# Altium PCB MS-002.28T003.PcbDoc
Units mil, origin at the board's own origin, x right, y up, seen from the top; angles counter-clockwise.
Board outline 984.25 x 11023.62 mil, 2 copper layers (Top Layer, Bottom Layer); 65 components, 33 nets, 132 pads, 22 vias.
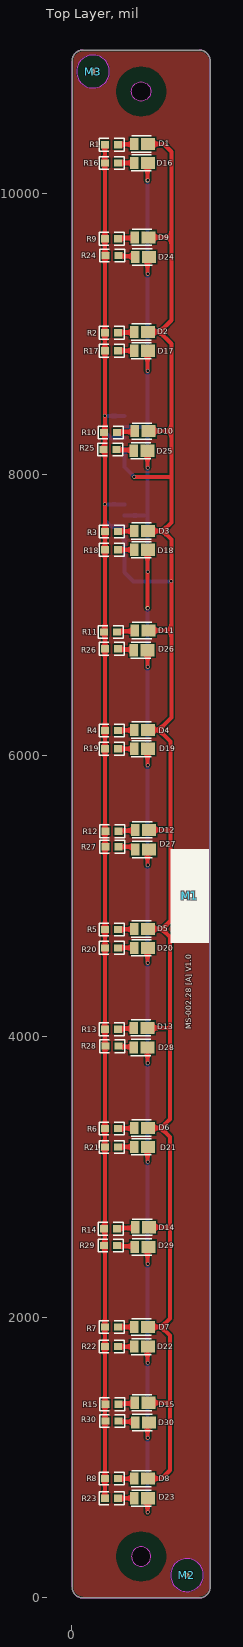
[diagram p0: Top Layer view]
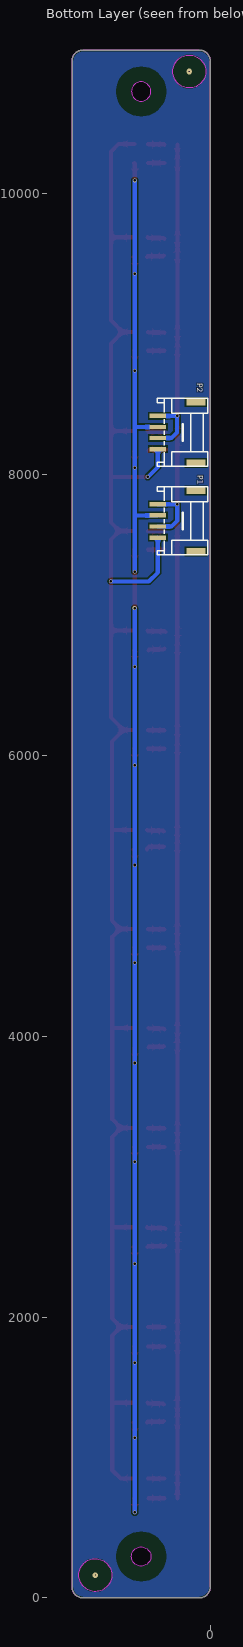
[diagram p1: Bottom Layer view, seen from below]
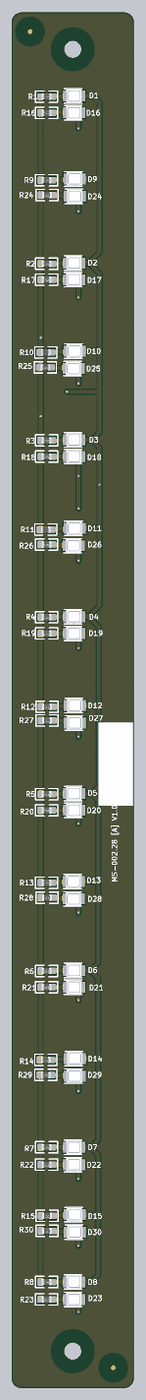
[diagram p2: 3D render of the assembled board from above, using the file's embedded part models]

## Layer stack, top to bottom
Top Solder: solder mask 0.4, Solder Resist, Dk 3.5
Top Layer: signal copper 1.4
Dielectric 1: dielectric 12.6, FR-4, Dk 4.8
Bottom Layer: signal copper 1.4
Bottom Solder: solder mask 0.4, Solder Resist, Dk 3.5

## Board outline
2.38,79.13 2.38,10945.27 cw(c81.12,10945.27) 81.12,11024.01 907.89,11024.01 cw(c907.89,10945.27) 986.63,10945.27 986.63,79.13 cw(c907.89,79.13) 907.89,0.39 81.12,0.39 cw(c81.12,79.13)
cut-out: 425.61,295.67 ccw(c494.51,295.67) 494.51,226.77 ccw(c494.51,295.67) 563.41,295.67 ccw(c494.51,295.67) 494.51,364.57 ccw(c494.51,295.67)
cut-out: 494.51,10659.84 cw(c494.51,10728.74) 425.61,10728.74 cw(c494.51,10728.74) 494.51,10797.64 cw(c494.51,10728.74) 563.41,10728.74 cw(c494.51,10728.74)

## Design rules (kind name [scope] priority, off if disabled: settings)
Clearance [All] p1: gap=10 ignorepadtopadclearanceinfootprint=FALSE except(0: Arc-Hole Track-Hole SMDPad-Hole THPad-Hole Via-Hole Fill-Hole Poly-Hole Region-Hole Text-Hole)
HoleSize [All] p1: absolutevalues=TRUE maxlimit=100 minlimit=0 maxpercent=80.000 minpercent=20.000
PolygonConnect [All] p1: connectstyle=Relief reliefconductorwidth=10 reliefentries=4 polygonreliefangle="90 Angle" airgapwidth=10
RoomDefinition MS-002.28T002 [InComponentClass('MS-002.28T002')] p1: confinementstyle=ConfineOut formatcopy=TRUE lockcomponents=FALSE outline 1229,391 2310,391 2310,730 1229,730
RoutingVias [All] p1: holewidth=18 width=25 viastyle="Through Hole" minholewidth=18 minwidth=25 maxholewidth=18 maxwidth=25
SilkToSolderMaskClearance [IsPad] p1: minsilkscreentomaskgap=0 clearancetoexposedcopper=TRUE
SolderMaskExpansion [All] p1: expansion=4 istentingtop=FALSE
Width [All] p1: maxlimit=30 minlimit=30 preferedwidth=30
28 further rules are at their usual default settings.

## Components (designator, comment, footprint, x,y, rotation, side; value= is the part's Value field where it differs from the comment)
D1 "HL-A-3528S31YC-S1-13HL" LED_2835#1 494.93,10354.72 r0 top
D2 "HL-A-3528S31YC-S1-13HL" LED_2835#1 494.93,9016.14 r0 top
D3 "HL-A-3528S31YC-S1-13HL" LED_2835#1 494.93,7598.82 r0 top
D4 "HL-A-3528S31YC-S1-13HL" LED_2835#1 494.93,6181.5 r0 top
D5 "HL-A-3528S31YC-S1-13HL" LED_2835#1 494.93,4764.17 r0 top
D6 "HL-A-3528S31YC-S1-13HL" LED_2835#1 494.93,3346.85 r0 top
D7 "HL-A-3528S31YC-S1-13HL" LED_2835#1 494.93,1929.53 r0 top
D8 "HL-A-3528S31YC-S1-13HL" LED_2835#1 494.93,850 r0 top
D9 "HL-A-3528S31YC-S1-13HL" LED_2835#2 450,9690 r0 top
D10 "HL-A-3528S31YC-S1-13HL" LED_2835#2 450,8310 r0 top
D11 "HL-A-3528S31YC-S1-13HL" LED_2835#2 450,6890 r0 top
D12 "HL-A-3528S31YC-S1-13HL" LED_2835#2 452.76,5470 r0 top
D13 "HL-A-3528S31YC-S1-13HL" LED_2835#2 442.76,4060 r0 top
D14 "HL-A-3528S31YC-S1-13HL" LED_2835#2 452.76,2640 r0 top
D15 "HL-A-3528S31YC-S1-13HL" LED_2835#2 450,1390 r0 top
D16 "HL-A-3528H203BC-S1-13HL" LED_2835#1 494.93,10220 r0 top
D17 "HL-A-3528H203BC-S1-13HL" LED_2835#1 494.93,8882.52 r0 top
D18 "HL-A-3528H203BC-S1-13HL" LED_2835#1 494.93,7465.04 r0 top
D19 "HL-A-3528H203BC-S1-13HL" LED_2835#1 494.93,6047.56 r0 top
D20 "HL-A-3528H203BC-S1-13HL" LED_2835#1 494.93,4630.08 r0 top
D21 "HL-A-3528H203BC-S1-13HL" LED_2835#1 494.93,3212.6 r0 top
D22 "HL-A-3528H203BC-S1-13HL" LED_2835#1 494.93,1790 r0 top
D23 "HL-A-3528H203BC-S1-13HL" LED_2835#1 494.93,710 r0 top
D24 "HL-A-3528H203BC-S1-13HL" LED_2835#2 452.76,9550 r0 top
D25 "HL-A-3528H203BC-S1-13HL" LED_2835#2 442.76,8170 r0 top
D26 "HL-A-3528H203BC-S1-13HL" LED_2835#2 442.76,6750 r0 top
D27 "HL-A-3528H203BC-S1-13HL" LED_2835#2 452.76,5330 r0 top
D28 "HL-A-3528H203BC-S1-13HL" LED_2835#2 442.76,3920 r0 top
D29 "HL-A-3528H203BC-S1-13HL" LED_2835#2 450,2500 r0 top
D30 "HL-A-3528H203BC-S1-13HL" LED_2835#2 452.76,1250 r0 top
M1 "粘贴标签位置" Label 840,5000 r90 top
M2 "MARK" MARK 821,163 r0 top
M3 "MARK" MARK 152,10871 r0 top
P1 "PHB-4" "PHB-4Y - duplicate" 240,7670 r270 bottom
P2 "PHB-4" PHB-4 240,8300 r270 bottom
R1 "470Ω/0805" 0805_R 330,10350 r180 top
R2 "470Ω/0805" 0805_R 330,9010 r180 top
R3 "470Ω/0805" 0805_R 330.42,7595.04 r180 top
R4 "470Ω/0805" 0805_R 330.42,6177.56 r180 top
R5 "470Ω/0805" 0805_R 330.42,4760.08 r180 top
R6 "470Ω/0805" 0805_R 330,3342.6 r180 top
R7 "470Ω/0805" 0805_R 330,1930 r180 top
R8 "470Ω/0805" 0805_R 330,850 r180 top
R9 "470Ω/0805" 0805_R 330,9680 r180 top
R10 "470Ω/0805" 0805_R 323.66,8300 r180 top
R11 "470Ω/0805" 0805_R 323.66,6880 r180 top
R12 "470Ω/0805" 0805_R 333.66,5460 r180 top
R13 "470Ω/0805" 0805_R 330,4050 r180 top
R14 "470Ω/0805" 0805_R 323.66,2630 r180 top
R15 "470Ω/0805" 0805_R 333.66,1380 r180 top
R16 "470Ω/0805" 0805_R 330,10220 r180 top
R17 "470Ω/0805" 0805_R 330.42,8882.52 r180 top
R18 "470Ω/0805" 0805_R 330.42,7465.04 r180 top
R19 "470Ω/0805" 0805_R 330.42,6047.56 r180 top
R20 "470Ω/0805" 0805_R 330.42,4630.08 r180 top
R21 "470Ω/0805" 0805_R 330,3212.6 r180 top
R22 "470Ω/0805" 0805_R 330,1790 r180 top
R23 "470Ω/0805" 0805_R 330,710 r180 top
R24 "470Ω/0805" 0805_R 333.66,9560 r180 top
R25 "470Ω/0805" 0805_R 320,8180 r180 top
R26 "470Ω/0805" 0805_R 330,6760 r180 top
R27 "470Ω/0805" 0805_R 333.66,5350 r180 top
R28 "470Ω/0805" 0805_R 333.66,3930 r180 top
R29 "470Ω/0805" 0805_R 323.66,2510 r180 top
R30 "470Ω/0805" 0805_R 333.66,1260 r180 top

## Footprints (in the part's own frame and the unit in brackets; to place one, negate y for a bottom-side part, rotate by r counter-clockwise, add the part's x,y. Pads: shape width x height; smd on the part's side, far side on the other; paste and mask are expansions set on the pad)
0805_R [mm]
  rect 1.45x1.3 smd: 1(0,0) 2(2.379,0)
  silkscreen extent -1.09,-1.15 3.43,1.15, body extent 0.17,-0.62 2.17,0.63, height 0.53
Label [mil] "粘贴标签位置"
  silkscreen extent -335,-138 335,138
LED_2835#1 [mm]
  rect 1.501x2.2 smd mask+0.05: 1(-1.235,0)
  rect 2.53x2.2 smd mask+0.05: 2(1.235,0)
  silkscreen extent -1.79,-1.46 1.86,1.46, body extent -1.52,-1.4 1.97,1.4, height 0.8
LED_2835#2 [mm]
  rect 1.501x2.2 smd mask+0.05: 1(0,0)
  rect 2.53x2.2 smd mask+0.05: 2(2.47,0)
  silkscreen extent -0.55,-1.46 3.09,1.46, body extent -0.29,-1.4 3.21,1.4, height 0.8
MARK [mil]
  Top Layer keep-out circle w3.94: c0,0 r117.15
  Bottom Layer keep-out circle w3.94: c0,0 r117.15
PHB-4 [mm]
  rect 1.2x3.5 smd: 0(-5.505,3.45) 0(5.505,3.45)
  rect 0.8x3 smd: 1(-3.005,-3.45) 2(-1.005,-3.45) 3(0.995,-3.45) 4(2.995,-3.45)
  silkscreen extent -6.18,-3.58 6.14,5.55, body extent -5.96,-4.04 5.94,4.26, height 5.55
"PHB-4Y - duplicate" [mm]
  rect 1.2x3.5 smd: 0(-5.505,3.45) 0(5.505,3.45)
  rect 0.8x3 smd: 1(-3.005,-3.45) 2(-1.005,-3.45) 3(0.995,-3.45) 4(2.995,-3.45)
  silkscreen extent -6.18,-3.58 6.14,5.55, body extent -5.96,-4.04 5.94,4.26, height 5.55

## Part data
D1 D2 D3 D4 D5 D6 D7 D8 D9 D10 D11 D12 D13 D14 D15 D16 D17 D18 D19 D20 D21 D22 D23 D24 D25 D26 D27 D28 D29 D30: library part LED3, "Typical BLUE SiC LED", DatasheetVersion=16-Apr-2002, LatestRevisionDate=17-Dec-2003, LatestRevisionNote="PCB Footprint replaced.", PackageDescription="SM LED; 2 C-Bend Leads; Body 3.5 x 2.8 x 1.9 mm, inc leads (LxWxH typ)", PackageReference=3.5X2.8X1.9, PackageVersion=16-Apr-2002, Published=8-Jun-2000, Publisher="Altium Limited"
M1: library part LABEL
M2 M3: "贴片所需MARK点"
P1 P2: library part HEADER4
R1 R2 R3 R4 R5 R6 R7 R8 R9 R10 R11 R12 R13 R14 R15 R16 R17 R18 R19 R20 R21 R22 R23 R24 R25 R26 R27 R28 R29 R30: library part "0805 13KΩ (1302) 1%", "贴片电阻", PACKAGE=0805, SuppliersPartNumber=C17455, ComponentLink1Description=供应商链接, ComponentLink1URL=http://www.szlcsc.com/product/details_18143.html, Supplier=LC

## Via types
v1: diameter 25, hole 18, Top Layer to Bottom Layer, tented both sides, 18 vias
v2: diameter 39.37, hole 0, Top Layer to Bottom Layer, 2 vias
v3: diameter 28, hole 18, Top Layer to Bottom Layer, tented both sides, 2 vias

## Nets (pads, with @x,y where several pads share a name; then routed paths per layer and width w, separated by ;. In a path a pad name is that pad's centre, name@x,y a point inside that pad or via, vN(x,y) a via of type N, cw(c..) or ccw(c..) an arc to the next point about the centre after c; other vN are vias at no path point)
NetD1_1: D1.1 R1.1 | length 118.3
  Top Layer w30: R1.1 332.36,10352.36 443.95,10352.36 D1.1
NetD1_2: D1.2 D2.2 D3.2 D4.2 D5.2 D6.2 D7.2 D8.2 D9.2 D10.2 D11.2 D12.2 D13.2 D14.2 D15.2 P1.4 P2.4 | length 12865.6
  Top Layer w30: v1(447,7984) 709,7984 710,7985 ; D13.2 699.17,4060 700,4059.17 ; D8.2 640,850 700,910 700,1389.53 ; D7.2 639.53,1929.53 ; D6.2 636.85,3346.85 ; D5.2 644.17,4764.17 ; D4.2 621.5,6181.5 ; D3.2 648.82,7598.82 ; D2.2 626.14,9016.14 ; D1.2 655.28,10354.72 710,10300 710,9690 ; D15.2 699.53,1390 700,1389.53 ; D11.2 710,6890 ; D10.2 710,8310 ; D9.2 710,9690 ; D14.2 696.85,2640 700,2636.85 ; D12.2 694.49,5470 702.99,5461.5 ; 621.5,6181.5 702.99,6100 702.99,5461.5 ; 621.5,6181.5 710,6270 710,6890 ; 626.14,9016.14 710,8932.28 710,8310 ; 626.14,9016.14 710,9100 710,9690 ; 636.85,3346.85 700,3283.7 700,2636.85 ; 636.85,3346.85 700,3410 700,4059.17 ; 639.53,1929.53 700,1869.05 700,1389.53 ; 639.53,1929.53 700,1990 700,2636.85 ; 644.17,4764.17 702.99,4822.99 702.99,5461.5 ; 644.17,4764.17 700,4708.34 700,4059.17 ; 648.82,7598.82 710,7537.64 v1(710,7240) 710,6890 ; 648.82,7598.82 710,7660 710,7985 ; 710,7985 710,8310
  Bottom Layer w30: P1.4 375.83,7304.17 440,7240 v1(710,7240) ; P2.4 375.83,8055.17 v1(447,7984)
NetD2_1: D2.1 R2.1 | length 118.9
  Top Layer w30: R2.1 333.07,9013.07 443.24,9013.07 D2.1
NetD3_1: D3.1 R3.1 | length 117.5
  Top Layer w30: R3.1 332.31,7596.93 444.42,7596.93 D3.1
NetD4_1: D4.1 R4.1 | length 117.5
  Top Layer w30: R4.1 332.39,6179.53 444.34,6179.53 D4.1
NetD5_1: D5.1 R5.1 | length 117.6
  Top Layer w30: R5.1 332.47,4762.13 444.26,4762.13 D5.1
NetD6_1: D6.1 R6.1 | length 118.1
  Top Layer w30: R6.1 332.13,3344.72 444.18,3344.72 D6.1
NetD7_1: D7.1 R7.1 | length 116.5
  Top Layer w30: R7.1 330.24,1929.76 446.07,1929.76 D7.1
NetD8_1: D8.1 R8.1 | length 116.3
  Top Layer w30: R8.1 D8.1
NetD9_1: D9.1 R9.1 | length 124.1
  Top Layer w30: R9.1 335,9685 445,9685 D9.1
NetD10_1: D10.1 R10.1 | length 130.5
  Top Layer w30: R10.1 328.66,8305 445,8305 D10.1
NetD11_1: D11.1 R11.1 | length 130.5
  Top Layer w30: R11.1 328.66,6885 445,6885 D11.1
NetD12_1: D12.1 R12.1 | length 123.2
  Top Layer w30: R12.1 338.66,5465 447.76,5465 D12.1
NetD13_1: D13.1 R13.1 | length 116.9
  Top Layer w30: R13.1 335,4055 437.76,4055 D13.1
NetD14_1: D14.1 R14.1 | length 133.2
  Top Layer w30: R14.1 328.66,2635 447.76,2635 D14.1
NetD15_1: D15.1 R15.1 | length 120.5
  Top Layer w30: R15.1 338.66,1385 445,1385 D15.1
NetD16_1: D16.1 R16.1 | length 116.3
  Top Layer w30: R16.1 D16.1
NetD16_2: D16.2 D17.2 D18.2 D19.2 D20.2 D21.2 D22.2 D23.2 D24.2 D25.2 D26.2 D27.2 D28.2 D29.2 D30.2 P1.2 P2.2 | length 11672
  Top Layer w30: v1(540,610) 540,706.45 D23.2 ; v1(540,1140) 540,1240 D30.2 ; v1(540,1676.45) 540,1786.45 D22.2 ; v1(540,2380) 540,2492.76 D29.2 ; v1(540,3108.22) 540,3209.05 D21.2 ; v1(540,3810) D28.2 ; v1(540,4523.55) 540,4626.53 D20.2 ; v1(540,5220) 540,5320 D27.2 ; v1(540,5930) 540,6044.01 D19.2 ; D26.2 543.55,6746.45 535.39,6738.28 540.78,6732.9 v1(540.78,6630.78) ; v1(540,8050) 540,8162.9 543.55,8166.45 D25.2 ; v1(540,8740) 540,8878.97 D17.2 ; v1(540,9430) 540,9540 D24.2 ; v3(540,10095) 540,10216.45 D16.2 ; v3(540.78,7049.22) 540,7050 540,7461.49 D18.2
  Bottom Layer w30: P1.2 530.21,7709.57 539.99,7699.79 v1(540,7310) ; P2.2 537.57,8339.57 540,8342 ; v1(540,610) v1(540,1140) v1(540,1676.45) v1(540,2380) v1(540,3108.22) v1(540,3810) v1(540,4523.55) v1(540,5220) v1(540,5930) 540,5907.1 540.78,5906.33 v1(540.78,6630.78) v3(540.78,7049.22) ; v3(540,10095) v1(540,9430) v1(540,8740) 540,8342 ; 540.88,7705.57 540,7706.45 v1(540,8050) 540,8342
NetD17_1: D17.1 R17.1 | length 115.9
  Top Layer w30: R17.1 D17.1
NetD18_1: D18.1 R18.1 | length 115.9
  Top Layer w30: R18.1 D18.1
NetD19_1: D19.1 R19.1 | length 115.9
  Top Layer w30: R19.1 D19.1
NetD20_1: D20.1 R20.1 | length 115.9
  Top Layer w30: R20.1 D20.1
NetD21_1: D21.1 R21.1 | length 116.3
  Top Layer w30: R21.1 D21.1
NetD22_1: D22.1 R22.1 | length 116.3
  Top Layer w30: R22.1 D22.1
NetD23_1: D23.1 R23.1 | length 111.5
  Top Layer w30: R23.1 441.06,710 441.22,710.16 D23.1@441.38,710
NetD24_1: D24.1 R24.1 | length 123.2
  Top Layer w30: R24.1 338.66,9555 447.76,9555 D24.1
NetD25_1: D25.1 R25.1 | length 126.9
  Top Layer w30: R25.1 325,8175 437.76,8175 D25.1
NetD26_1: D26.1 R26.1 | length 116.9
  Top Layer w30: R26.1 335,6755 437.76,6755 D26.1
NetD27_1: D27.1 R27.1 | length 130.6
  Top Layer w30: R27.1 438.21,5350 452.76,5335.45 D27.1
NetD28_1: D28.1 R28.1 | length 113.2
  Top Layer w30: R28.1 338.66,3925 437.76,3925 D28.1
NetD29_1: D29.1 R29.1 | length 130.5
  Top Layer w30: R29.1 328.66,2505 445,2505 D29.1
NetD30_1: D30.1 R30.1 | length 123.2
  Top Layer w30: R30.1 338.66,1255 447.76,1255 D30.1
VCC: P1.1 P1.3 P2.1 P2.3 R1.2 R2.2 R3.2 R4.2 R5.2 R6.2 R7.2 R8.2 R9.2 R10.2 R11.2 R12.2 R13.2 R14.2 R15.2 R16.2 R17.2 R18.2 R19.2 R20.2 R21.2 R22.2 R23.2 R24.2 R25.2 R26.2 R27.2 R28.2 R29.2 R30.2 | length 10461.4
  Top Layer w30: R23.2 R8.2 R22.2 R7.2 R21.2 R6.2 236.55,3342.81 236.55,4629.87 R20.2 R5.2 R19.2 R4.2 R18.2 R3.2 v1(236.76,7788.31) R17.2 236.55,8882.73 236.55,9009.79 R2.2 R16.2 R1.2
  Bottom Layer w30: P1.3 279.17,7630.83 236.76,7673.24 v1(236.76,7788.31) P1.1 ; P2.3 279.17,8260.83 239,8301 239,8416 v1(237,8418) 237.31,8418.31 P2.1
pads on no net: P1.0 P2.0
copper on no net:
  other v2: 821,163 152,10871

## Polygon pours and split planes (outlines as drawn)
no net on Bottom Layer "NONET_L02_P001" (solid, pour order 1): 2.38,79.13 2.38,10945.27 cw(c81.12,10945.27) 81.12,11024.01 907.89,11024.01 cw(c907.89,10945.27) 986.63,10945.27 986.63,79.13 cw(c907.89,79.13) 907.89,0.39 81.12,0.39 cw(c81.12,79.13)
no net on Top Layer "NONET_L01_P000" (solid, pour order 0): 2.38,79.13 2.38,10945.27 cw(c81.12,10945.27) 81.12,11024.01 907.89,11024.01 cw(c907.89,10945.27) 986.63,10945.27 986.63,79.13 cw(c907.89,79.13) 907.89,0.39 81.12,0.39 cw(c81.12,79.13)

## Keep-outs
Keep-Out Layer:
  pour cut-out: 152,10871
  lines w0.5: 2.57,78.83 ccw(c81.31,78.83) 81.31,0.09 908.08,0.09 ccw(c908.08,78.83) 986.82,78.83 986.82,10944.97 ccw(c908.08,10944.97) 908.08,11023.71 81.31,11023.71 ccw(c81.31,10944.97) 2.57,10944.97 2.57,78.83

## Other copper
Top Layer:
  pour cut-out: 317.34,10728.74 ccw(c494.51,10728.74) 494.51,10551.57 ccw(c494.51,10728.74) 671.67,10728.74 ccw(c494.51,10728.74) 494.51,10905.9 ccw(c494.51,10728.74)
  pour cut-out: 317.34,10728.74 ccw(c494.51,10728.74) 494.51,10551.57 ccw(c494.51,10728.74) 671.67,10728.74 ccw(c494.51,10728.74) 494.51,10905.9 ccw(c494.51,10728.74)
  pour cut-out: 317.34,295.67 ccw(c494.51,295.67) 494.51,118.5 ccw(c494.51,295.67) 671.67,295.67 ccw(c494.51,295.67) 494.51,472.83 ccw(c494.51,295.67)
  pour cut-out: 821,43.15 cw(c821,163) 701.15,163 cw(c821,163) 821,282.85 cw(c821,163) 940.85,163 cw(c821,163)
  pour cut-out: 152,10751.15 cw(c152,10871) 32.15,10871 cw(c152,10871) 152,10990.85 cw(c152,10871) 271.85,10871 cw(c152,10871)
  pour cut-out: 152,10871
  pour cut-out: 152,10871
Bottom Layer:
  pour cut-out: 317.34,10728.74 ccw(c494.51,10728.74) 494.51,10551.57 ccw(c494.51,10728.74) 671.67,10728.74 ccw(c494.51,10728.74) 494.51,10905.9 ccw(c494.51,10728.74)
  pour cut-out: 317.34,295.67 ccw(c494.51,295.67) 494.51,118.5 ccw(c494.51,295.67) 671.67,295.67 ccw(c494.51,295.67) 494.51,472.83 ccw(c494.51,295.67)
  pour cut-out: 821,42.89 cw(c821,163) 700.89,163 cw(c821,163) 821,283.11 cw(c821,163) 941.11,163 cw(c821,163)
  pour cut-out: 152,10750.89 cw(c152,10871) 31.89,10871 cw(c152,10871) 152,10991.11 cw(c152,10871) 272.11,10871 cw(c152,10871)

## Silkscreen, mask and mechanical layers (free items; w line width, h text height)
Top Overlay:
  text "MS-002.28 [A] V1.0" at 850,4050 h40 r90
Mechanical 1:
  circle w0.5: c494.51,10728.74 r68.9
  circle w0.5: c494.51,295.67 r68.9
  lines w0.5: 2.38,79.13 ccw(c81.12,79.13) 81.12,0.39 907.89,0.39 ccw(c907.89,79.13) 986.63,79.13 986.63,10945.27 ccw(c907.89,10945.27) 907.89,11024.01 81.12,11024.01 ccw(c81.12,10945.27) 2.38,10945.27 2.38,79.13